# Altium PCB LDR right,back,left.PcbDoc
Units mm, origin at the board's own origin, x right, y up, seen from the top; angles counter-clockwise.
Board outline 62 x 74 mm, 2 copper layers (Top Layer, Bottom Layer); 48 components, 22 nets, 135 pads, 8 vias.
Unrouted connection lines stored in the file: 13.
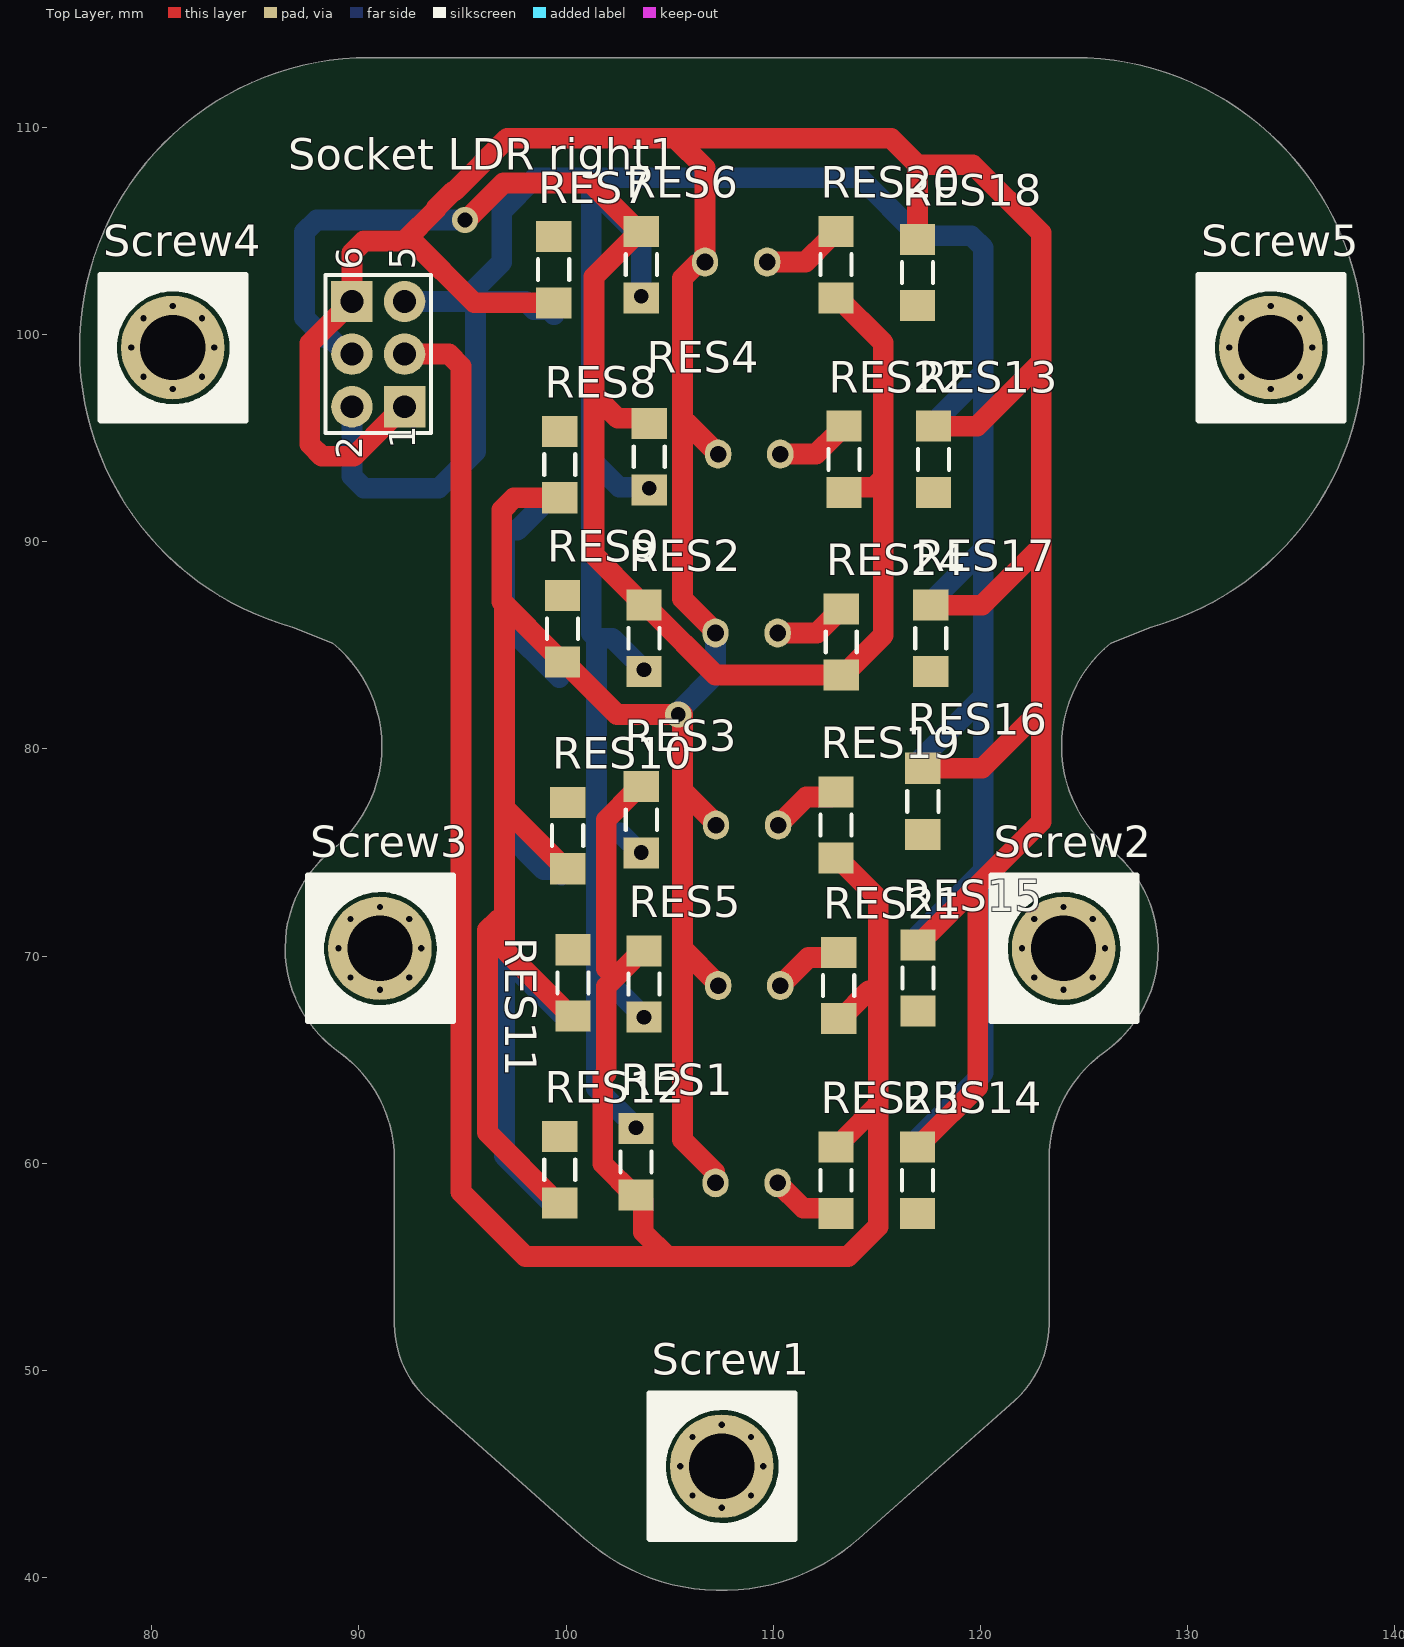
[diagram p0: Top Layer view]
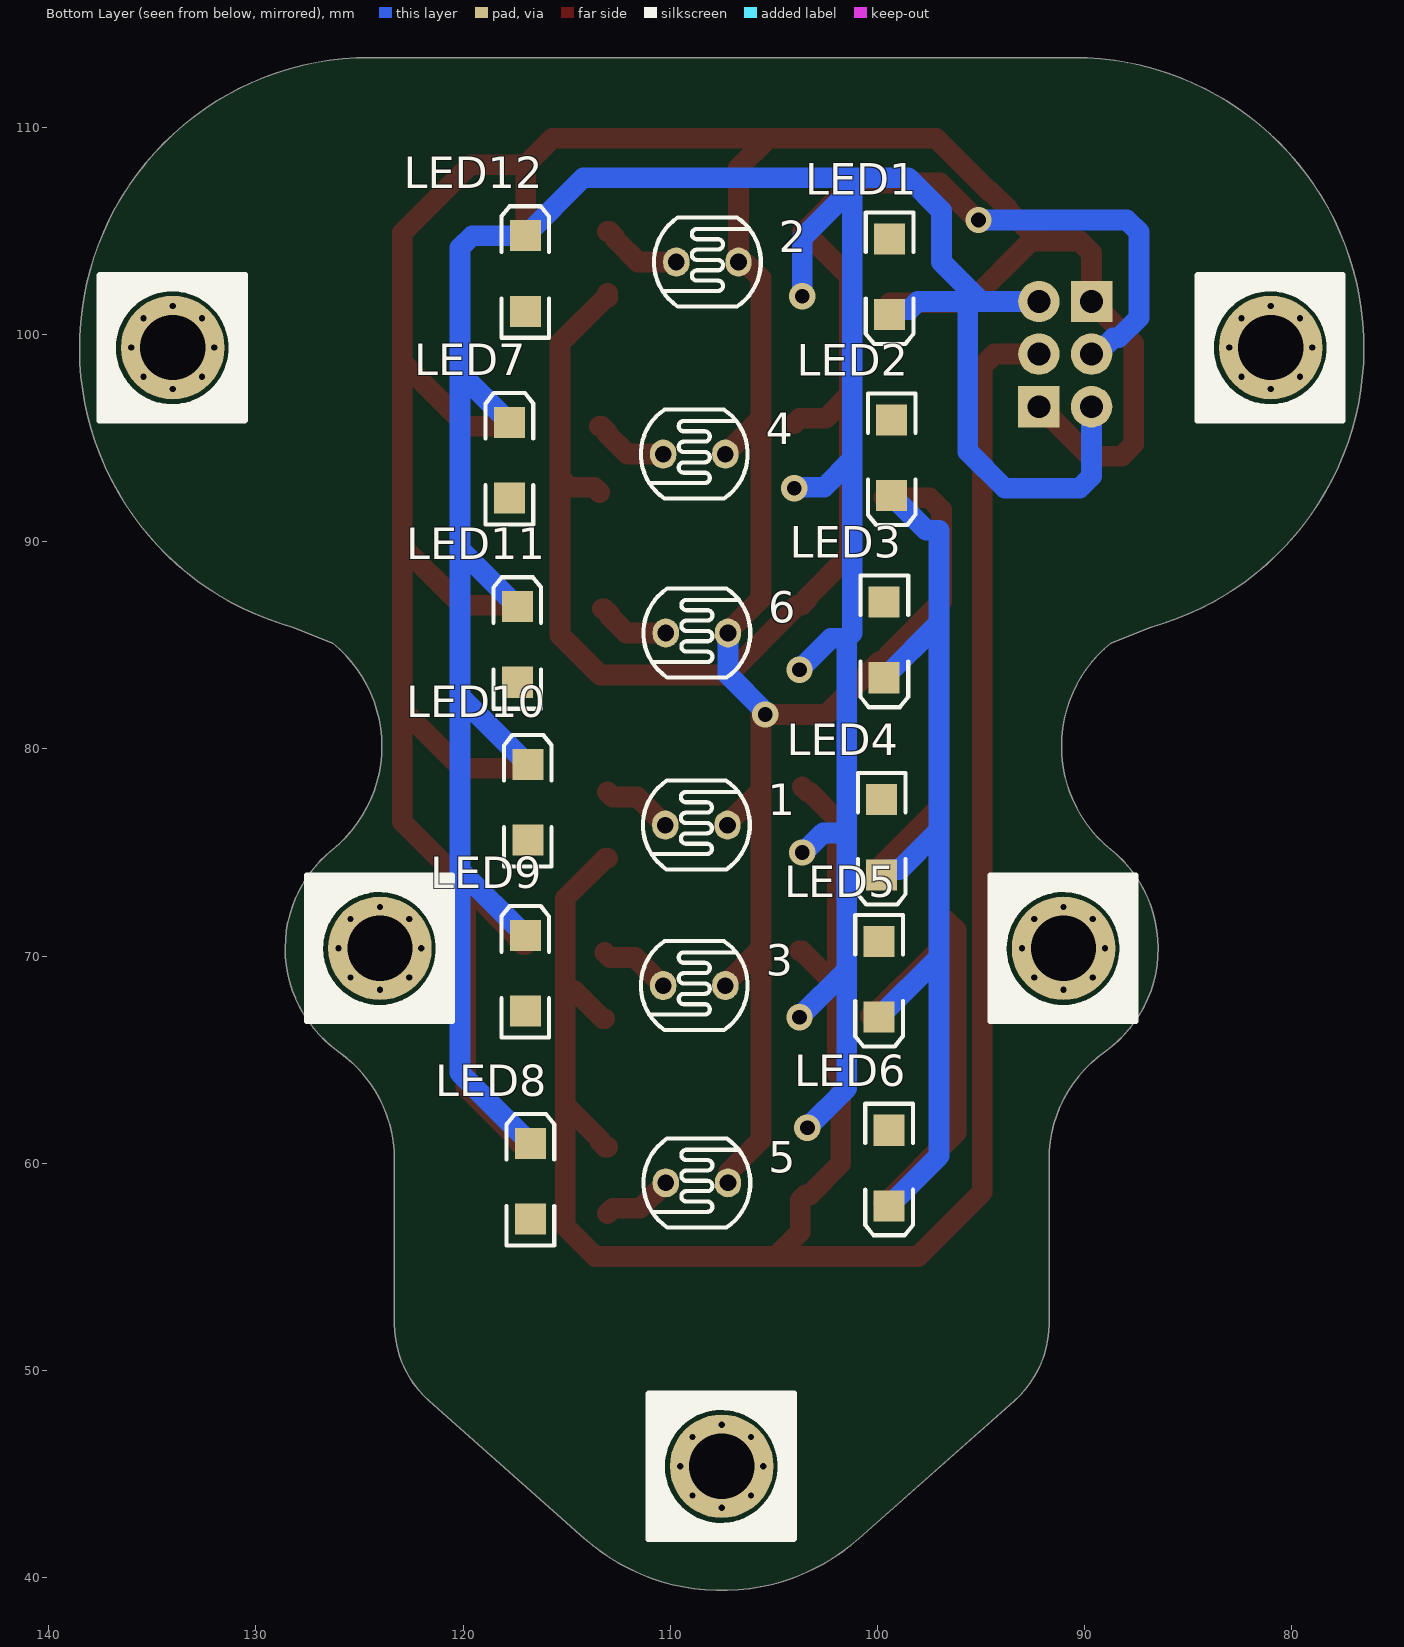
[diagram p1: Bottom Layer view, seen from below]

## Layer stack, top to bottom
Top Solder: solder mask 0.0102, Solder Resist, Dk 3.5
Top Layer: signal copper 0.0356
Dielectric 1: dielectric 0.32, FR-4, Dk 4.8
Bottom Layer: signal copper 0.0356
Bottom Solder: solder mask 0.0102, Solder Resist, Dk 3.5

## Board outline
91.713,52.268 91.713,60.17 ccw(c85.316,60.17) 89.02,65.386 cw(c92.563,70.376) 88.725,75.143 ccw(c84.713,80.126) 88.725,85.109 86.871,85.858 cw(c90.513,99.376) 90.513,113.376 124.513,113.376 cw(c124.513,99.376) 128.155,85.858 126.301,85.109 ccw(c130.313,80.126) 126.301,75.143 cw(c122.463,70.376) 126.006,65.386 ccw(c129.71,60.17) 123.313,60.17 123.313,52.268 cw(c118.313,52.268) 121.63,48.526 114.146,41.893 cw(c107.513,49.376) 100.88,41.893 93.396,48.526 cw(c96.713,52.268)

## Design rules (kind name [scope] priority, off if disabled: settings)
Clearance [All] p1: gap=0.254 ignorepadtopadclearanceinfootprint=FALSE except(0: Arc-Hole Track-Hole SMDPad-Hole THPad-Hole Via-Hole Fill-Hole Poly-Hole Region-Hole Text-Hole)
PolygonConnect [All] p1: connectstyle=Relief reliefconductorwidth=0.254 reliefentries=4 polygonreliefangle="90 Angle" airgapwidth=0.254
RoutingVias [All] p1: holewidth=0.711 width=1.27 viastyle="Through Hole" minholewidth=0.711 minwidth=1.27 maxholewidth=0.711 maxwidth=1.27
SolderMaskExpansion [All] p1: expansion=0.102 istentingtop=FALSE
SupplyNets "Schematic Supply Nets_1" [InNet('GND')] p1: voltage=0.000
SupplyNets "Schematic Supply Nets" [InNet('+5')] p2: voltage=0.000
Width [All] p1: maxlimit=2 minlimit=0.7 preferedwidth=1 minimp=50.000000 maximp=50.000000 favimp=50.000000
30 further rules are at their usual default settings.

## Components (designator, comment, footprint, x,y, rotation, side; value= is the part's Value field where it differs from the comment)
1 "Photo Cell" PhotoCell. 108.736,76.327 r180 bottom
2 "Photo Cell" PhotoCell. 108.204,103.505 r180 bottom
3 "Photo Cell" PhotoCell. 108.839,68.58 r180 bottom
4 "Photo Cell" PhotoCell. 108.839,94.234 r180 bottom
5 "Photo Cell" PhotoCell. 108.712,59.055 r180 bottom
6 "Photo Cell" PhotoCell. 108.712,85.598 r180 bottom
LED1 "SMD" "LED SMD" 99.441,102.489 r270 bottom
LED2 "SMD" "LED SMD" 99.339,93.76 r270 bottom
LED3 "SMD" "LED SMD" 99.695,84.963 r270 bottom
LED4 "SMD" "LED SMD" 99.822,75.438 r270 bottom
LED5 "SMD" "LED SMD" 99.949,68.58 r270 bottom
LED6 "SMD" "LED SMD" 99.466,59.47 r270 bottom
LED7 "SMD" "LED SMD" 117.729,94.234 r90 bottom
LED8 "SMD" "LED SMD" 116.713,59.436 r90 bottom
LED9 "SMD" "LED SMD" 116.967,69.469 r90 bottom
LED10 "SMD" "LED SMD" 116.84,77.724 r90 bottom
LED11 "SMD" "LED SMD" 117.348,85.344 r90 bottom
LED12 "SMD" "LED SMD" 116.967,103.251 r90 bottom
RES1 "SMD" "Resistor SMD 1206" 103.378,60.071 r270 top
RES2 "SMD" "Resistor SMD 1206" 103.759,85.344 r90 top
RES3 "SMD" "Resistor SMD 1206" 103.632,76.581 r90 top
RES4 "SMD" "Resistor SMD 1206" 104.013,94.107 r90 top
RES5 "SMD" "Resistor SMD 1206" 103.759,68.656 r90 top
RES6 "SMD" "Resistor SMD 1206" 103.632,103.378 r90 top
RES7 "SMD" "Resistor SMD 1206" 99.403,103.136 r90 top
RES8 "SMD" "Resistor SMD 1206" 99.695,93.726 r90 top
RES9 "SMD" "Resistor SMD 1206" 99.822,85.801 r90 top
RES10 "SMD" "Resistor SMD 1206" 100.076,75.819 r90 top
RES11 "SMD" "Resistor SMD 1206" 100.33,68.707 r90 top
RES12 "SMD" "Resistor SMD 1206" 99.695,59.69 r90 top
RES13 "SMD" "Resistor SMD 1206" 117.729,93.98 r270 top
RES14 "SMD" "Resistor SMD 1206" 116.967,59.182 r270 top
RES15 "SMD" "Resistor SMD 1206" 116.992,68.944 r270 top
RES16 "SMD" "Resistor SMD 1206" 117.221,77.47 r270 top
RES17 "SMD" "Resistor SMD 1206" 117.602,85.344 r270 top
RES18 "SMD" "Resistor SMD 1206" 116.967,102.997 r270 top
RES19 "SMD" "Resistor SMD 1206" 113.03,76.327 r90 top
RES20 "SMD" "Resistor SMD 1206" 113.03,103.378 r90 top
RES21 "SMD" "Resistor SMD 1206" 113.157,68.58 r90 top
RES22 "SMD" "Resistor SMD 1206" 113.411,93.98 r90 top
RES23 "SMD" "Resistor SMD 1206" 113.03,59.182 r270 top
RES24 "SMD" "Resistor SMD 1206" 113.284,85.166 r90 top
Screw1 "Screw" Screw 107.513,45.376 r0 top locked
Screw2 "Screw" Screw 124.013,70.376 r0 top locked
Screw3 "Screw" Screw 91.013,70.376 r0 top locked
Screw4 "Screw" Screw 81.013,99.376 r0 top locked
Screw5 "Screw" Screw 134.013,99.376 r0 top locked
"Socket LDR right1" "IDC 2X3" "IDC 2X3" 90.932,99.06 r90 top

## Footprints (in the part's own frame and the unit in brackets; to place one, negate y for a bottom-side part, rotate by r counter-clockwise, add the part's x,y. Pads: shape width x height; smd on the part's side, far side on the other; paste and mask are expansions set on the pad)
"IDC 2X3" [mm] "DS1013-6"
  rect 2x2 hole 1.1: 1(-2.54,-1.27) 6(2.54,1.27)
  round 2 hole 1.1: 2(-2.54,1.27) 3(0,-1.27) 4(0,1.27) 5(2.54,-1.27)
  silkscreen extent -3.81,-2.54 3.81,2.54, body extent -7.62,-4.86 7.62,4.59, height 9.1
"LED SMD" [mm]
  rect 1.5x1.5 smd: 1(-2.125,0.025) 2(1.525,0.025)
  silkscreen extent -3.4,-1.12 2.95,1.18, body extent -1.92,-0.7 1.38,0.75, height 1.36
PhotoCell. [mm]
  oval 1.27x1.397 hole 0.8: 1(-1.5,0) 2(1.5,0)
  silkscreen extent -2.58,-2.15 2.58,2.15, body extent -2.61,-2.16 2.61,2.14, height 2.74
"Resistor SMD 1206" [mm]
  rect 1.5x1.7 smd: 1(-1.6,0) 2(1.6,0)
  silkscreen extent -0.5,-0.75 0.5,0.75, body extent -1.6,-0.8 1.6,0.8, height 0.55
Screw [mm]
  round 0.6 hole 0.3: S(-2,0) S(-1.414,-1.414) S(-1.414,1.414) S(0,-2) S(0,2) S(1.414,-1.414) S(1.414,1.414) S(2,0)
  round 5 hole 3.15 mask+0.1: S(0,0)
  silkscreen extent -3.49,-3.53 3.56,3.52, body extent -2.8,-2.8 2.8,2.8, height 3.88

## Part data
1 2 3 4 5 6: library part "Photo Cell..", LatestRevisionDate=17-Jul-2002, LatestRevisionNote="Re-released for DXP Platform.", Publisher="Altium Limited"
LED1 LED2 LED3 LED4 LED5 LED6 LED7 LED8 LED9 LED10 LED11 LED12: library part "LED SMD"
RES1 RES2 RES3 RES4 RES5 RES6 RES7 RES8 RES9 RES10 RES11 RES12 RES13 RES14 RES15 RES16 RES17 RES18 RES19 RES20 RES21 RES22 RES23 RES24: library part "Res SMD"
Screw1 Screw2 Screw3 Screw4 Screw5: LatestRevisionDate=17-Jul-2002, LatestRevisionNote="Re-released for DXP Platform.", Publisher="Altium Limited"

## Via types
v1: diameter 1.27, hole 0.711, Top Layer to Bottom Layer, 8 vias

## Nets (pads, with @x,y where several pads share a name; then routed paths per layer and width w, separated by ;. In a path a pad name is that pad's centre, name@x,y a point inside that pad or via, vN(x,y) a via of type N, cw(c..) or ccw(c..) an arc to the next point about the centre after c; other vN are vias at no path point)
+5: 1.2 2.2 3.2 4.2 5.2 6.2 "Socket LDR right1.1" "Socket LDR right1.6" RES7.1 RES8.1 RES9.1 RES10.1 RES11.1 RES12.1 RES13.1 RES14.1 RES15.1 RES16.1 RES17.1 RES18.1 | length 256.7
  Top Layer w1: 92.202,96.52 91.702,96.02 91.643,96.02 89.747,94.124 88.216,94.124 87.63,94.71 87.63,99.568 89.662,101.6 89.662,103.935 90.248,104.521 92.202,104.521 ; 97.028,86.895 97.028,77.167 ; RES7.1 95.568,101.536 92.583,104.521 92.202,104.521 ; RES12.1 99.595,58.09 96.203,61.483 96.203,71.257 96.701,71.755 97.028,71.755 ; RES8.1 97.487,92.126 96.901,91.54 96.901,87.122 99.472,84.551 99.472,84.451 99.722,84.201 RES9.1 99.922,84.201 102.462,81.661 v1(105.41,81.661) 105.617,81.661 105.617,78.009 ; RES10.1 99.976,74.219 97.028,77.167 ; RES11.1 100.23,67.107 97.028,70.309 97.028,71.755 ; 5.2 107.16,59.107 107.16,59.591 105.617,61.134 105.617,70.365 ; 6.2 107.212,85.654 105.617,87.249 105.617,95.758 ; 1.2 107.236,76.391 105.617,78.009 ; 3.2 107.339,68.644 105.617,70.365 ; 4.2 107.329,94.234 105.805,95.758 105.617,95.758 ; RES14.1 117.067,60.782 117.317,61.032 117.317,61.132 119.871,63.686 119.871,73.423 ; RES18.1 116.967,108.204 ; RES15.1 117.092,70.544 117.342,70.794 117.342,70.894 119.871,73.423 ; RES16.1 120.091,79.07 122.936,81.915 ; RES17.1 120.091,86.944 122.936,89.789 ; RES13.1 119.837,95.58 122.936,98.679 ; 92.202,104.521 93.734,106.053 93.734,106.112 94.548,106.926 94.607,106.926 97.155,109.474 105.283,109.474 ; 97.028,71.755 97.028,77.167 ; 105.283,109.474 106.704,108.053 2.2 106.589,103.39 106.286,103.39 105.617,102.721 105.617,95.758 ; 105.283,109.474 115.697,109.474 116.967,108.204 ; 105.617,70.365 105.617,78.009 ; 116.967,108.204 119.634,108.204 122.936,104.902 122.936,98.679 ; 119.871,73.423 122.936,76.488 122.936,81.915 ; 122.936,81.915 122.936,89.789 ; 122.936,89.789 122.936,98.679
  Bottom Layer w1: v1(105.41,81.661) 105.41,81.788 107.212,83.59 6.2
GND: "Socket LDR right1.2" "Socket LDR right1.5" LED1.2 LED2.2 LED3.2 LED4.2 LED5.2 LED6.2 LED7.2 LED8.2 LED9.2 LED10.2 LED11.2 LED12.2 RES1.1 RES2.1 RES3.1 RES4.1 RES5.1 RES6.1 | length 229.8
  Bottom Layer w1: 89.662,96.548 89.662,96.52 89.662,93.169 90.248,92.583 93.853,92.583 95.631,94.361 95.631,101.6 ; 92.202,101.6 94.996,101.6 ; LED2.2 97.63,90.551 97.028,90.551 97.028,86.08 ; LED1.2 99.166,101.214 98.441,101.214 98.055,101.6 95.631,101.6 ; LED6.2 97.028,60.358 97.028,69.951 ; LED3.2 97.028,86.08 ; LED4.2 99.547,74.163 98.938,74.163 97.028,76.073 ; LED5.2 97.028,69.951 ; v1(103.378,61.722) 101.473,63.627 101.473,69.342 ; v1(103.632,75.006) 103.559,75.006 102.619,75.946 101.473,75.946 ; v1(103.632,101.854) 103.632,104.648 101.219,107.061 ; v1(103.759,67.056) 101.473,69.342 ; v1(103.759,83.82) 102.235,85.344 101.473,85.344 ; v1(104.013,92.583) 103.961,92.635 102.564,92.635 101.219,93.98 ; LED8.2 120.142,64.365 120.142,74.144 ; LED10.2 120.142,82.526 ; LED9.2 120.142,74.144 ; LED11.2 120.142,89.638 ; LED7.2 120.142,98.147 ; 94.996,101.6 95.313,101.917 96.901,103.505 96.901,105.967 98.503,107.569 100.711,107.569 ; 94.996,101.6 95.631,101.6 ; 97.028,69.951 97.028,76.073 ; 97.028,76.073 97.028,86.08 ; 100.711,107.569 101.219,107.061 ; 100.711,107.569 114.199,107.569 LED12.2 119.556,104.776 120.142,104.19 120.142,98.147 ; 101.219,93.98 101.219,85.598 101.473,85.344 ; 101.219,93.98 101.219,107.061 ; 101.473,69.342 101.473,75.946 ; 101.473,75.946 101.473,85.344 ; 120.142,74.144 120.142,82.526 ; 120.142,82.526 120.142,89.638 ; 120.142,89.638 120.142,98.147
Net1_1: 1.1 RES19.2 | length 3.5
  Top Layer w1: 1.1 110.246,76.327 111.596,77.677 112.78,77.677 RES19.2
Net2_1: 2.1 RES20.2 | length 4
  Top Layer w1: 2.1 111.557,103.505 112.68,104.628 112.68,104.728 112.93,104.978 RES20.2
Net3_1: 3.1 RES21.2 | length 3.5
  Top Layer w1: 3.1 110.349,68.58 111.699,69.93 112.907,69.93 RES21.2
Net4_1: 4.1 RES22.2 | length 3.7
  Top Layer w1: 4.1 112.065,94.234 113.061,95.23 113.061,95.33 113.311,95.58 RES22.2
Net5_1: 5.1 RES23.2 | length 3.4
  Top Layer w1: 5.1 110.222,59.055 111.445,57.832 112.78,57.832 RES23.2
Net6_1: 6.1 RES24.2 | length 3.6
  Top Layer w1: 6.1 112.116,85.598 112.934,86.416 112.934,86.516 113.184,86.766 RES24.2
NetLED1_1: LED1.1 RES7.2
NetLED2_1: LED2.1 RES8.2
NetLED3_1: LED3.1 RES9.2
NetLED4_1: LED4.1 RES10.2
NetLED5_1: LED5.1 RES11.2
NetLED6_1: LED6.1 RES12.2
NetLED7_1: LED7.1 RES13.2
NetLED8_1: LED8.1 RES14.2
NetLED9_1: LED9.1 RES15.2
NetLED10_1: LED10.1 RES16.2
NetLED11_1: LED11.1 RES17.2
NetLED12_1: LED12.1 RES18.2
Right1: "Socket LDR right1.3" RES1.2 RES3.2 RES5.2 RES19.1 RES21.1 RES23.1 | length 116.1
  Top Layer w1: 92.202,99.06 94.347,99.06 94.933,98.474 94.933,58.61 98.044,55.499 104.902,55.499 ; RES3.2 103.382,77.931 103.282,77.931 101.934,76.583 101.934,69.389 102.363,68.96 ; RES5.2 103.659,70.256 102.363,68.96 ; RES23.1 113.13,60.782 113.38,61.032 113.38,61.132 115.062,62.814 ; RES19.1 113.13,74.727 115.062,72.795 115.062,68.326 ; RES21.1 113.257,66.98 114.603,68.326 115.062,68.326 ; 102.363,68.96 101.934,68.531 101.934,64.333 101.774,64.173 101.774,59.975 103.278,58.471 RES1.2 103.478,58.471 103.728,58.221 103.728,56.673 104.902,55.499 ; 104.902,55.499 113.613,55.499 115.062,56.948 115.062,62.814 ; 115.062,62.814 115.062,68.326
Right2: "Socket LDR right1.4" RES2.2 RES4.2 RES6.2 RES20.1 RES22.1 RES24.1 | length 82.1
  Top Layer w1: v1(95.123,105.537) 95.196,105.537 96.974,107.315 101.195,107.315 RES6.2@103.532,104.978 ; RES6.2 RES6.2@103.532,104.978 ; RES4.2 103.763,95.957 102.495,95.957 101.346,97.106 ; RES20.1 RES20.1@113.03,101.878 ; RES20.1@113.03,101.981 RES20.1@113.03,101.878 ; RES22.1 113.661,92.63 114.855,92.63 115.316,93.091 ; 101.346,97.106 101.346,89.357 103.409,87.294 103.409,87.194 103.659,86.944 RES2.2 103.859,86.944 104.109,86.694 104.109,86.673 107.216,83.566 RES24.1 113.384,83.566 115.316,85.498 115.316,93.091 ; 101.346,97.106 101.346,102.792 RES6.2@103.532,104.978 ; RES20.1@113.03,101.878 115.316,99.592 115.316,93.091
  Bottom Layer w1: 89.662,99.06 89.391,99.06 88.605,99.846 88.35,99.846 87.376,100.82 87.376,104.951 87.962,105.537 v1(95.123,105.537)
pads on no net: Screw1.S Screw2.S Screw3.S Screw4.S Screw5.S

## Silkscreen, mask and mechanical layers (free items; w line width, h text height)
Mechanical 1:
  circle w0.013: c124.013,70.376 r1.55
  circle w0.013: c91.013,70.376 r1.55
  circle w0.013: c81.013,99.376 r1.55
  circle w0.013: c134.013,99.376 r1.55
  circle w0.013: c107.513,45.376 r1.55
  lines w0.013: 85.013,91.376 ccw(c87.013,91.376) 87.013,89.376 95.013,89.376 95.013,51.376 ccw(c97.013,51.376) 97.013,49.376 118.013,49.376 ccw(c118.013,51.376) 120.013,51.376 120.013,89.376 128.013,89.376 ccw(c128.013,91.376) 130.013,91.376 130.013,107.376 ccw(c128.013,107.376) 128.013,109.376 87.013,109.376 ccw(c87.013,107.376) 85.013,107.376 85.013,91.376 ; 86.871,85.858 cw(c90.513,99.376) 90.513,113.376 124.513,113.376 cw(c124.513,99.376) 128.155,85.858 126.301,85.109 ccw(c130.313,80.126) 126.301,75.143 cw(c122.463,70.376) 126.006,65.386 ccw(c129.71,60.17) 123.313,60.17 123.313,52.268 cw(c118.313,52.268) 121.63,48.526 114.146,41.893 cw(c107.513,49.376) 100.88,41.893 93.396,48.526 cw(c96.713,52.268) 91.713,52.268 91.713,60.17 ccw(c85.316,60.17) 89.02,65.386 cw(c92.563,70.376) 88.725,75.143 ccw(c84.713,80.126) 88.725,85.109 86.871,85.858

## Text inside footprints (layer, text, board x,y; h text height)
"Socket LDR right1": Top Overlay "6" at 90.17,103.124 h1.27 r90; Top Overlay "5" at 92.71,103.124 h1.27 r90; Top Overlay "2" at 90.17,93.98 h1.27 r90; Top Overlay "1" at 92.71,94.488 h1.27 r90